# Altium PCB PCB1.PcbDoc
Units mil, origin at the board's own origin, x right, y up, seen from the top; angles counter-clockwise.
Board outline 1750 x 1250 mil, 4 copper layers (Top Layer, Layer 1, Layer 2, Bottom Layer), stack 60.119 mil thick; 34 components, 23 nets, 88 pads, 21 vias.
Unrouted connection lines stored in the file: 1.
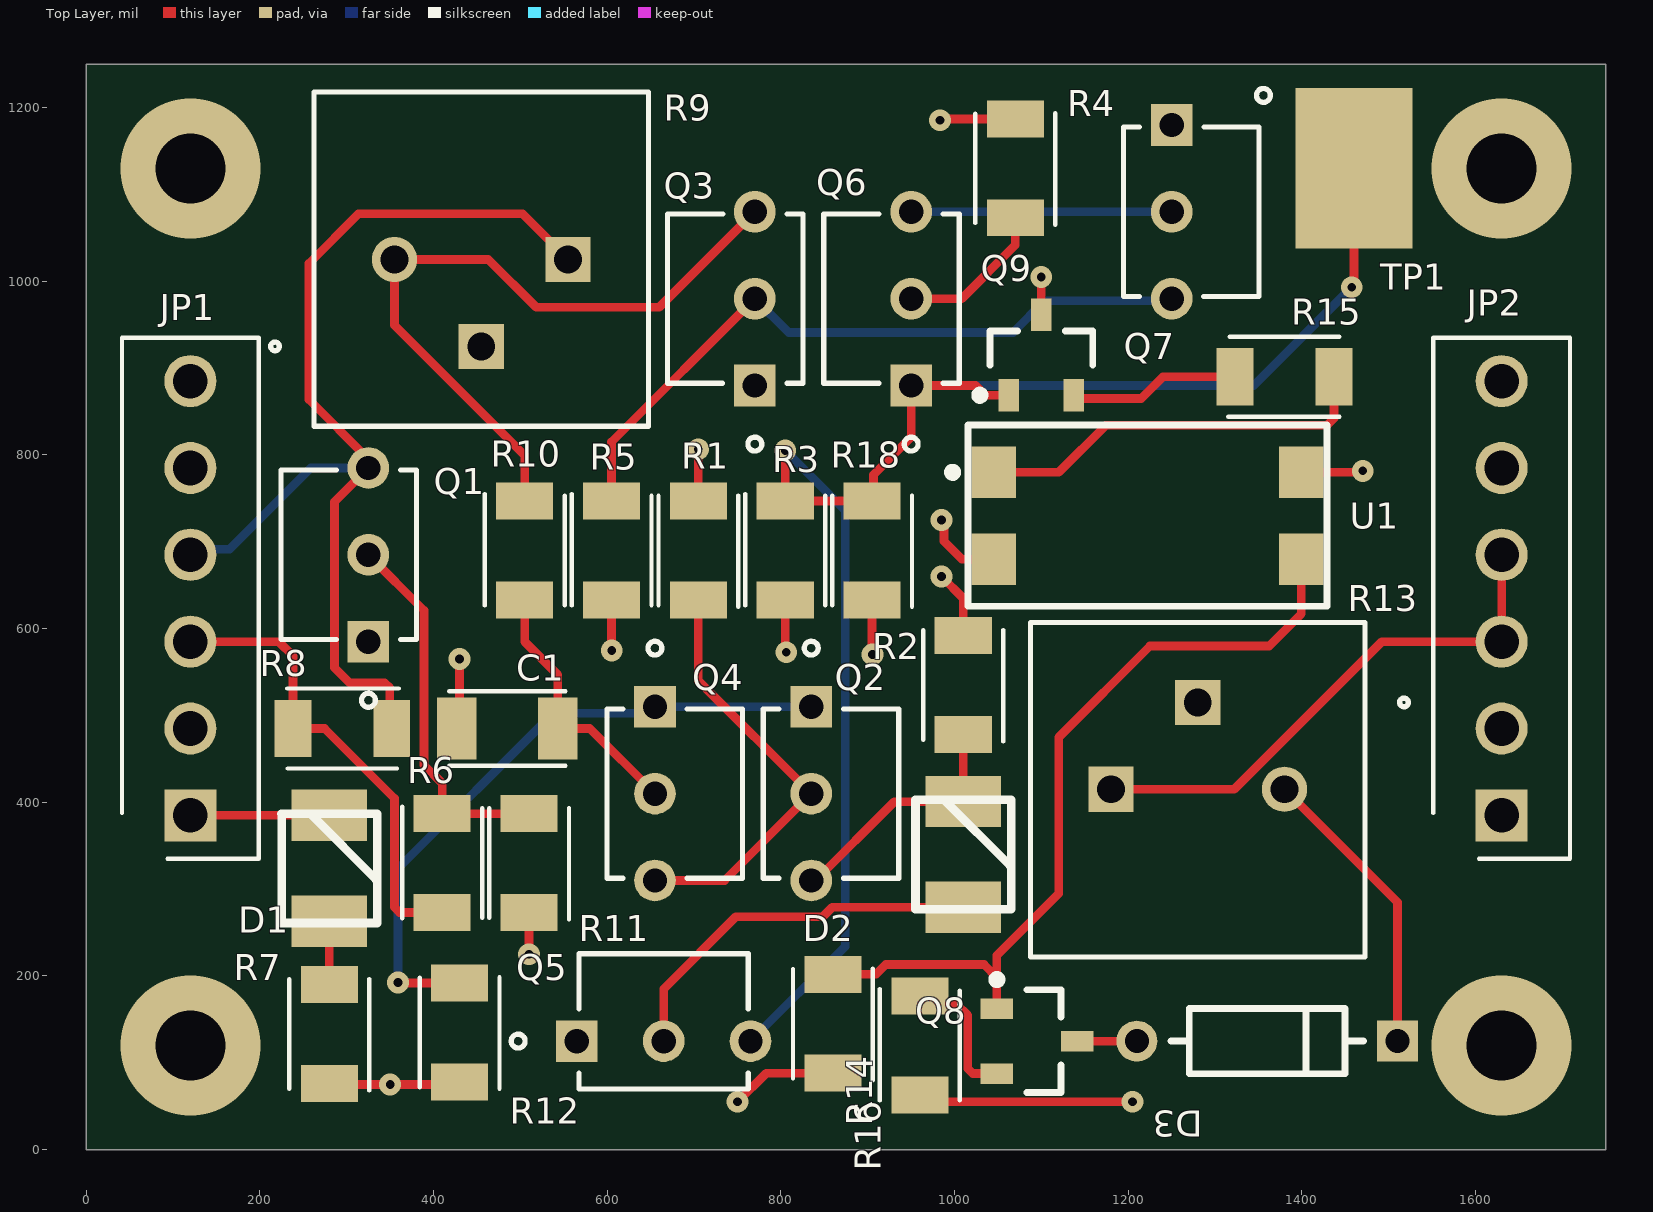
[diagram p0: Top Layer view]
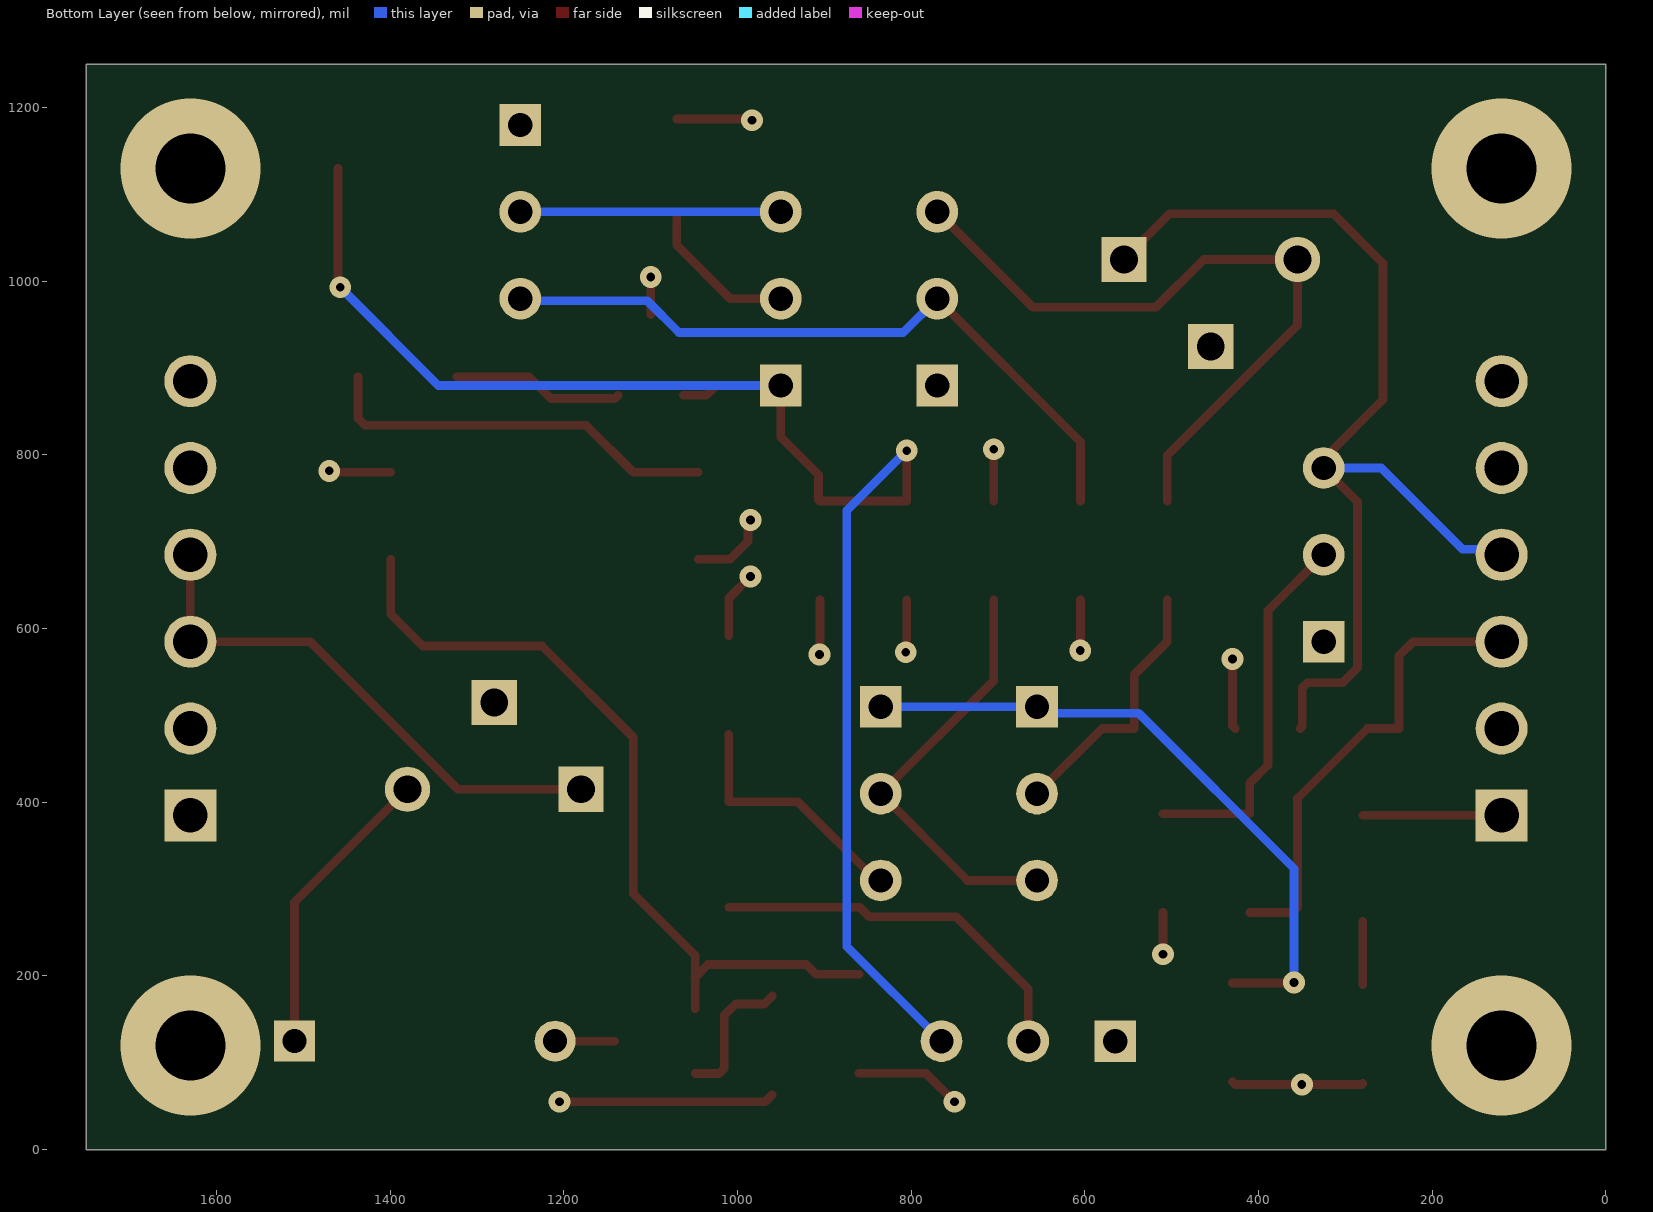
[diagram p1: Bottom Layer view, seen from below]
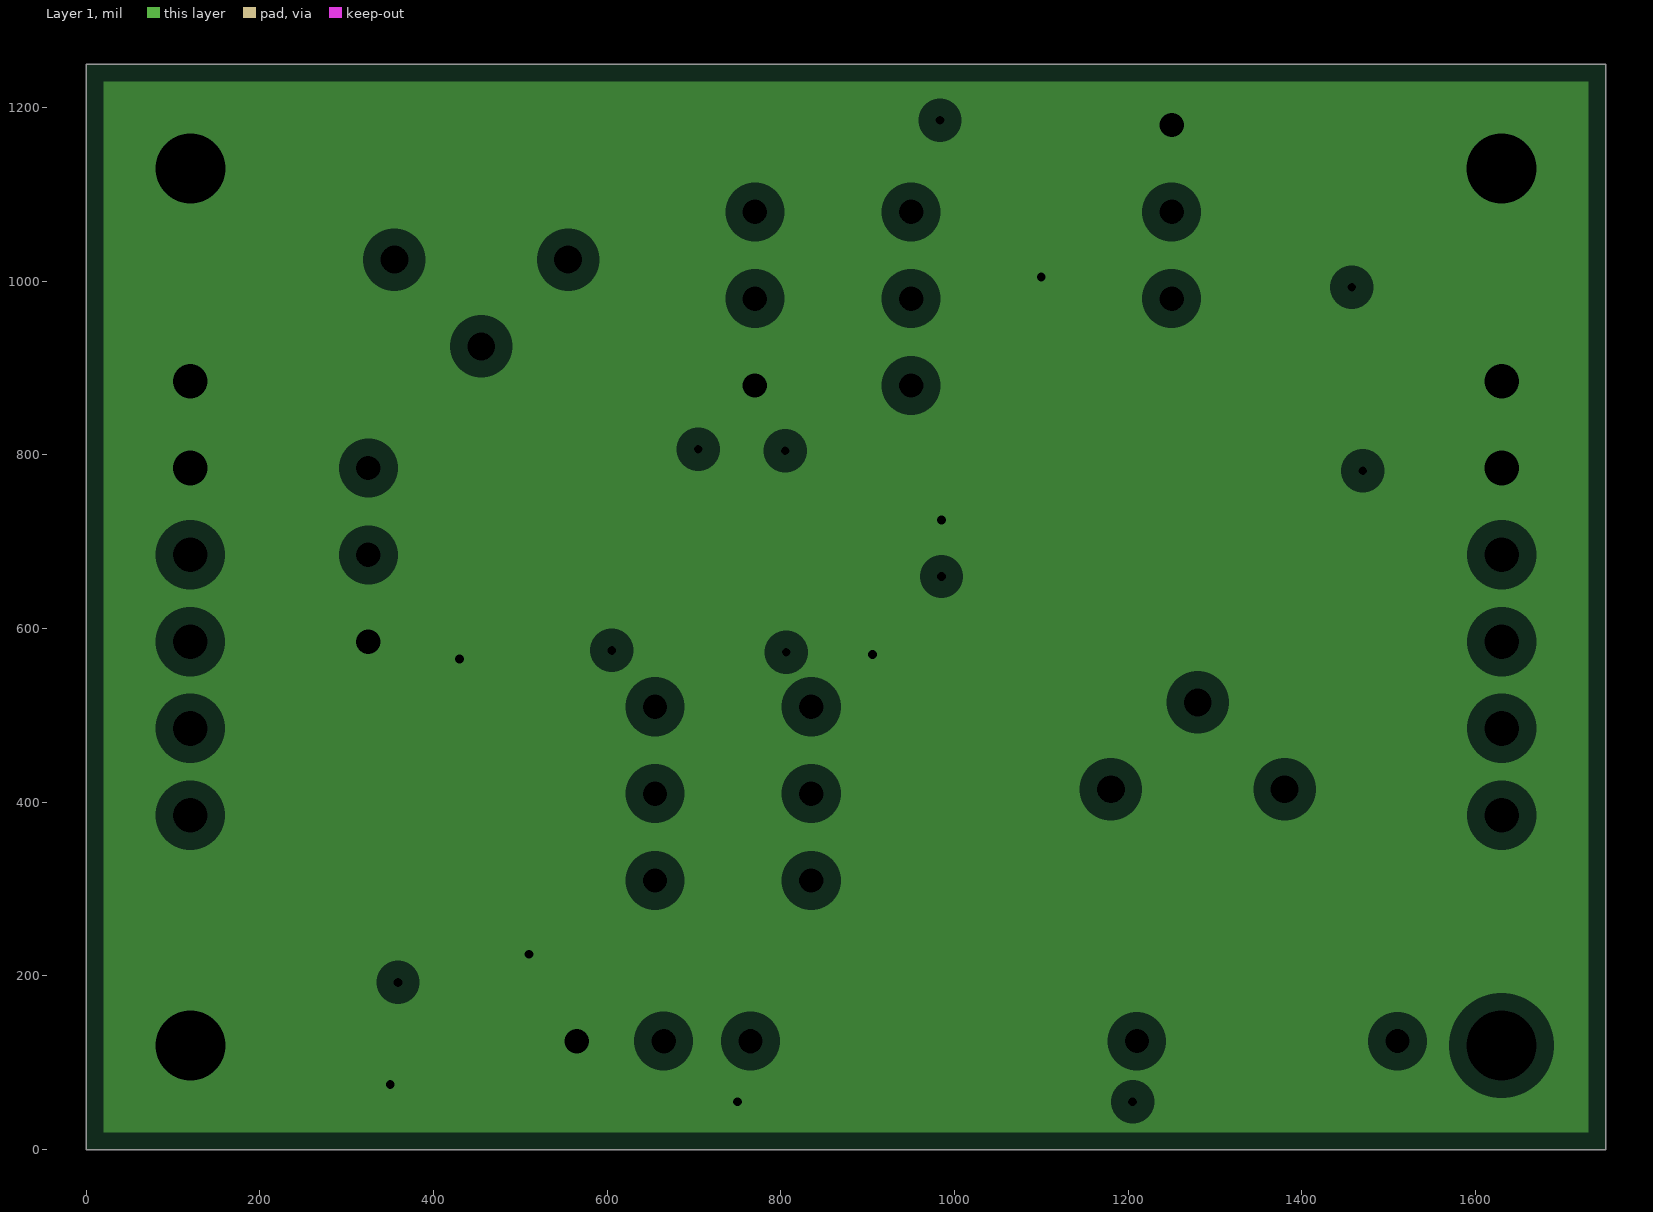
[diagram p2: Layer 1, clearances drawn from the general rule]
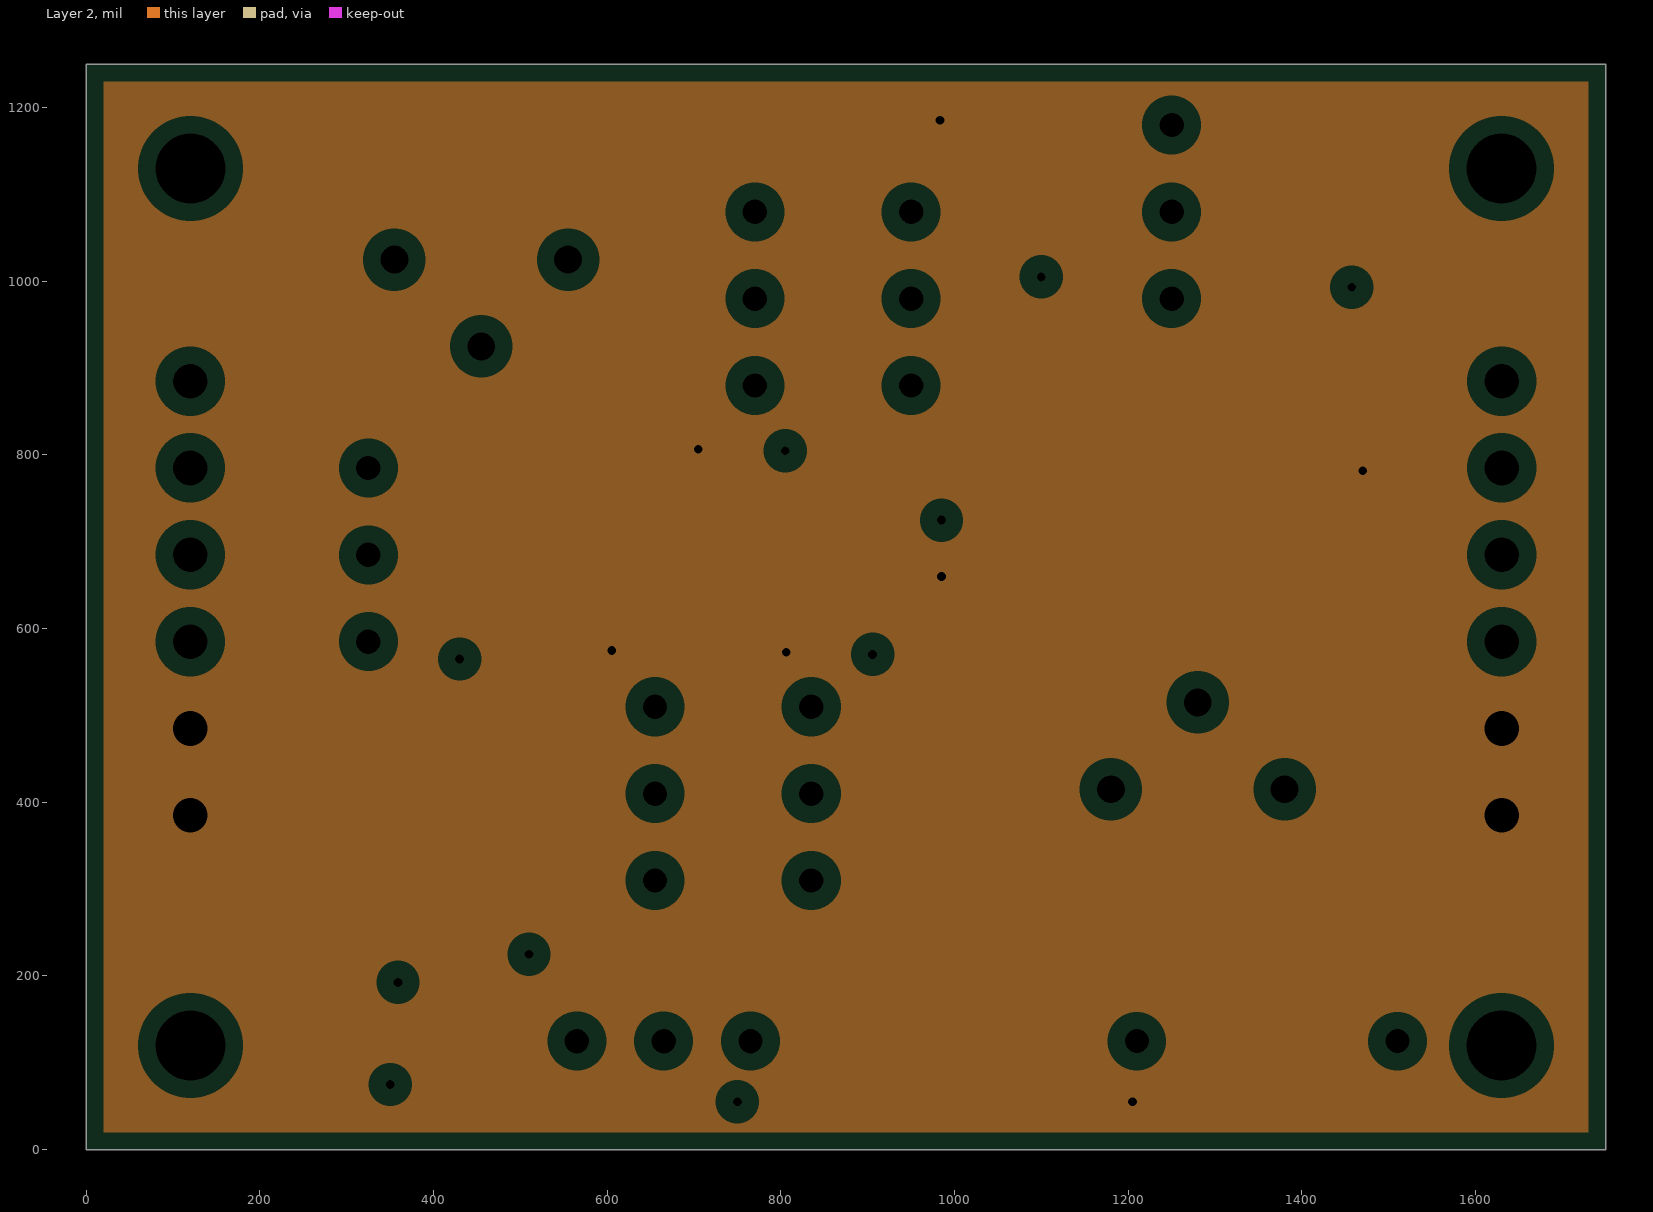
[diagram p3: Layer 2, clearances drawn from the general rule]
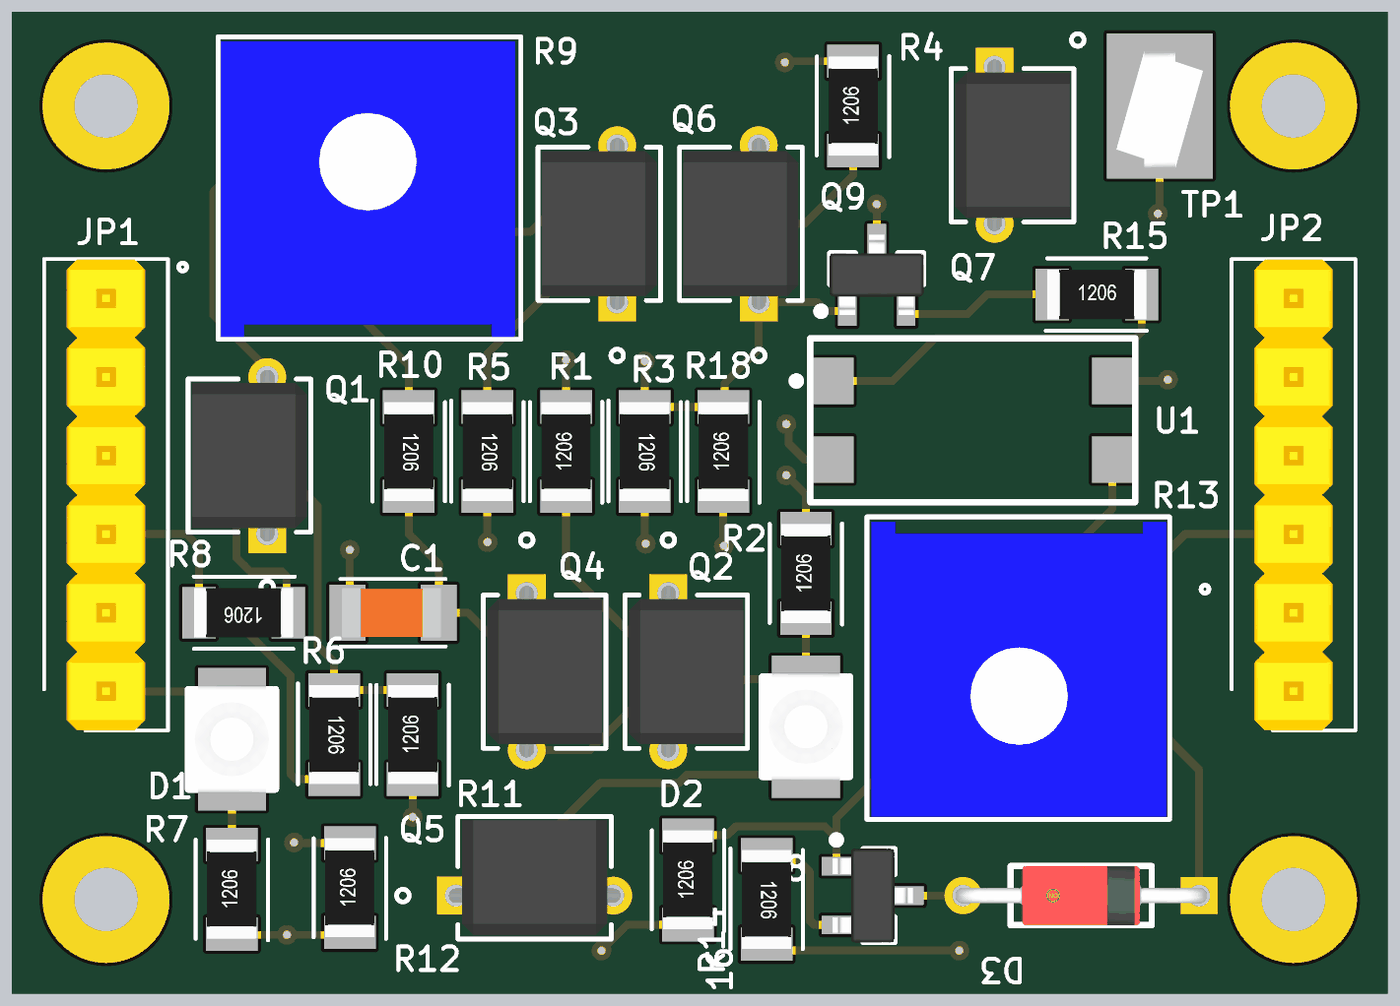
[diagram p4: 3D render of the assembled board from above, using the file's embedded part models]

## Layer stack, top to bottom
Top Solder: solder mask 0.4, Solder Resist, Dk 3.5
Top Layer: signal copper 0.689
Dielectric 2: prepreg 7.717, PP-006, Dk 4.74
Layer 1: plane copper 1.378, net GND
Dielectric 1: core 40.551, FR-4, Dk 4.6
Layer 2: plane copper 1.378, net +3V3
Dielectric 3: prepreg 7.717, PP-006, Dk 4.74
Bottom Layer: signal copper 0.689
Bottom Solder: solder mask 0.4, Solder Resist, Dk 3.5

## Board outline
0,0 0,1250 1750,1250 1750,0

## Design rules (kind name [scope] priority, off if disabled: settings)
Clearance [All] p1: gap=10 ignorepadtopadclearanceinfootprint=FALSE
PlaneClearance [All] p1: clearance=20
PlaneConnect [All] p1: planeconnectstyle=Relief reliefexpansion=20 reliefentries=4 reliefconductorwidth=10 reliefairgap=10
PolygonConnect [All] p1: connectstyle=Relief reliefconductorwidth=10 reliefentries=4 polygonreliefangle="90 Angle" airgapwidth=10
RoutingVias [All] p1: holewidth=10 width=25 viastyle="Through Hole" minholewidth=8 minwidth=18 maxholewidth=28 maxwidth=50
SolderMaskExpansion [All] p1: expansion=4 istentingtop=FALSE
SupplyNets "Schematic Supply Nets_1" [InNet('+3V3')] p1: voltage=0.000
SupplyNets "Schematic Supply Nets" [InNet('GND')] p2: voltage=0.000
Width [All] p1: maxlimit=10 minlimit=10 preferedwidth=10
28 further rules are at their usual default settings.

## Components (designator, comment, footprint, x,y, rotation, side; value= is the part's Value field where it differs from the comment)
C1 "C3216X5R1E476M160AC" C1206 485,485 r0 top
D1 "AA3528SESK/J3" 2-PLCC-RED 280,323.98 r270 top
D2 "AA3528SESK/J3" 2-PLCC-RED 1010,340 r270 top
D3 "1N4148WT" FP-017AG-MFG 1360,125 r180 top value=4pF
JP1 "HEADER_6X1" HEADER1x6PITCH100 120,385 r90 top
JP2 "HEADER_6X1" HEADER1x6PITCH100 1630,385 r90 top
Q1 "2n2222a" 2n2222a-Footprint-1 325,585 r90 top
Q2 "2n2222a" 2n2222a-Footprint-1 835,510 r270 top
Q3 "2n2222a" 2n2222a-Footprint-1 770,880 r90 top
Q4 "2n2222a" 2n2222a-Footprint-1 655,510 r270 top
Q5 "2n2222a" 2n2222a-Footprint-1 565,125 r0 top
Q6 "2n2222a" 2n2222a-Footprint-1 950,880 r90 top
Q7 "2n2222a" 2n2222a-Footprint-1 1250,1180 r270 top locked
Q8 "2N7002" 2N7002 1095,125 r0 top
Q9 "2N7002" 2N7002 1100,915 r90 top
R1 "RNCF1206TKY10K0" R1206 705,690 r90 top
R2 "ERJ-8ENF2001V" R1206 1010,535 r90 top
R3 "1k" R1206 805,690 r270 top
R4 "100k" R1206 1070,1130 r90 top
R5 "ERJ-8ENF2001V" R1206 605,690 r270 top
R6 "RNCF1206TKY10K0" R1206 410,330 r270 top
R7 "330" R1206 280,133.11 r90 top
R8 "ERJ-8ENF2000V" R1206 295,485 r180 top
R9 "Bourns 3386P-1-104LF" "Bourns 3386P-1-104LF-Footprint-1" 355,1025 r0 top
R10 "ERJ-8ENF2001V" R1206 505,690 r270 top
R11 "1k" R1206 510,330 r90 top
R12 "330" R1206 430,135 r90 top
R13 "3386P-1-504LF" 3386P-1-504LF-Footprint-1 1380,415 r180 top value=500kΩ
R14 "1k" R1206 960,120 r270 top
R15 "1k" R1206 1380,890 r0 top
R16 "RNCF1206TKY10K0" R1206 860,145 r90 top
R18 "ERJ-8ENF1004V" R1206 905,690 r90 top
TP1 "5016" 5016 1460,1130 r90 top
U1 "LTV-817S" LTST-LTV-817S-4_V 1222.17,730 r0 top

## Footprints (in the part's own frame and the unit in brackets; to place one, negate y for a bottom-side part, rotate by r counter-clockwise, add the part's x,y. Pads: shape width x height; smd on the part's side, far side on the other; paste and mask are expansions set on the pad)
2-PLCC-RED [mm] "Kingbright LED Footprint"
  rect 1.5x2.2 smd: 1(1.55,0) 2(-1.55,0)
  silkscreen extent -1.6,-1.4 1.6,1.4, body extent -1.75,-1.4 1.75,1.4, height 1.85
2n2222a-Footprint-1 [mil]
  rect 48x48 / inner round 60 / far side rect 48x48 hole 28 paste-99999 mask+0: 1(0,0)
  round 48 / inner round 60 / far side round 48 hole 28 paste-99999 mask+0: 2(100,0) 3(200,0)
  silkscreen extent -75,-55 198,101, body extent -9,-50 209,96, height 445
2N7002 [mm] "SOT23, 3-Leads, Body 2.92x2.35mm, Pitch 0.95mm, IPC Medium Density"
  rect 0.95x0.6 smd: 1(-1.175,0.95) 2(-1.175,-0.95) 3(1.175,0)
  silkscreen extent -1.3,-1.5 0.7,1.92, body extent -1.3,-1.52 1.3,1.52, height 1.11
3386P-1-504LF-Footprint-1 [mil]
  round 52 / inner round 60 / far side round 52 hole 32 paste-99999 mask+0: 1(0,0)
  rect 52x52 / inner round 60 / far side rect 52x52 hole 32 paste-99999 mask+0: 2(100,-100) 3(200,0)
  silkscreen extent -142,-192 292,193, body extent -89,-186 286,189, height 190
5016 [mil] "PC TEST POINT COMPACT SMT"
  rect 185x135 smd: 1(0,0)
  body extent -80,-55 70,55, height 91
"Bourns 3386P-1-104LF-Footprint-1" [mil]
  round 52 / inner round 60 / far side round 52 hole 32 paste-99999 mask+0: 1(0,0)
  rect 52x52 / inner round 60 / far side rect 52x52 hole 32 paste-99999 mask+0: 2(100,-100) 3(200,0)
  silkscreen extent -142,-192 292,193, body extent -90,-188 285,187, height 190
C1206 [mm] "3.20 mm L X 1.60 mm W X 1.40 mm H body"
  rect 1.16x1.82 smd: 1(-1.475,0) 2(1.475,0)
  silkscreen extent -1.7,-1.09 1.7,1.09, body extent -1.65,-0.8 1.55,0.8, height 1.15
FP-017AG-MFG [mm]
  rect 1.2x1.2 hole 0.7 paste-2539.97 mask+0: 1(-3.813,0)
  round 1.2 hole 0.7 paste-2539.97 mask+0: 2(3.813,0)
  silkscreen extent -2.81,-0.95 2.81,0.95, body extent -4.51,-1.05 4.51,1.05, height 0.25
HEADER1x6PITCH100 [mil] "Header1x6 .100\" Pitch Pin Header"
  rect 60x60 hole 40 paste-99999: 1(0,0)
  round 60 hole 40 paste-99999: 2(100,0)
  round 60 hole 40: 3(200,0) 4(300,0) 5(400,0) 6(500,0)
  silkscreen extent -50,-79 550,79, body extent -50,-50 550,50, height 384
LTST-LTV-817S-4_V [mm] "SMD, 4-Leads, Body 7x5.1mm, Pitch 2.54mm"
  rect 1.3x1.5 smd: 1(-4.5,1.27) 2(-4.5,-1.27) 3(4.5,-1.27) 4(4.5,1.27)
  silkscreen extent -5.82,-2.65 5.25,2.65, body extent -3.5,-2.55 3.5,2.55, height 4.4
R1206 [mm] "Resistor, Chip; 1206; 24 mil Height"
  rect 1.08x1.67 smd: 1(-1.445,0) 2(1.445,0)
  silkscreen extent -1.65,-1.17 1.61,1.17, body extent -1.6,-0.8 1.6,0.8, height 0.6

## Part data
C1: library part CMP-054-000061-1, "CER 47uF 25V X5R 1206 2.082mOhm", Design Item ID=C3216X5R1E476M160AC, Source=Capacitors.SchLib
D1 D2: library part CMP-043-000017-1, "LED Red 2.2V 20mA", Design Item ID=AA3528SESK/J3, Made By="Kyle Marino", Source=Diodes.SchLib
D3: library part CMP-00188-1, "Rectifier Diode, 1 Phase, 1 Element, 0.15A, 100V V(RRM), Silicon", Average Rectified Current=200mA, Case/Package=Axial, Current=3A, Forward Voltage=1V, Manufacturer Lifecycle Status=ACTIVE, Max Forward Surge Current (Ifsm)=2A, Max Junction Temperature (Tj)=175°C, Max Power Dissipation=500mW, Max Repetitive Reverse Voltage (Vrrm)=100V, Max Surge Current=4A, Min Operating Temperature=-55°C, Peak Reverse Current=5µA, Voltage=75V, China RoHS=Non-Compliant, Contact Plating=Tin, Country of Origin="Mainland China", Current Rating=200mA, Element Configuration=Single, Export Control Classification Number (ECCN) Code=EAR99, Forward Current=200mA, Harmonized Tariff Schedule (HTS) Code=8541.10.00.70, Height=1.91mm, Introduction Date=1999-01-01, Lead Free="Lead Free", Length=6.35mm, Lifecycle Status=Production, Max Operating Temperature=175°C, Max Output current=200mA, Max Reverse Voltage (DC)=100V, Mounting Technology="Through Hole", Number of Elements=1, Number of Terminals=2, Output Current=200mA, Outside Diameter=1.85mm, Peak Non-Repetitive Surge Current=4A, Pins=2, Polarity=Standard, Power Dissipation=500mW, Radiation Hardening=No, REACH SVHC=Yes, Recovery Time=4ns, Reverse Recovery Time=4ns, Reverse Standoff Voltage=100V, Reverse Voltage=100V, RoHS=Compliant, Schedule B="8541100070, 8541100070", Termination=Axial, Voltage Rating (DC)=100V, Weight=4.535924g, Width=6.35mm
JP1 JP2: library part CMP-021-000031-1, "HEADER VERT 6POS .100 TIN", Design Item ID=HEADER_6X1, Made By="Brennan Swanton", Reviewed By="Carter Allen", Source=Connectors.SchLib
Q1 Q2 Q3 Q4 Q5 Q6 Q7: library part CMP-00187-1, "Bipolar (BJT) Transistor NPN 40 V 600 mA 250MHz 625 mW Through Hole TO-92"
Q8 Q9: library part CMP-056-000001-1, "MOSFET N-CH 60V 115 mA", Design Item ID=2N7002, Made By="Kyle Marino", Source=Transistors.SchLib
R1 R6 R16: library part CMP-024-000097-3, "RES 10K OHM 0.01% 1/4W 1206", Design Item ID=RNCF1206TKY10K0, Made By="Jamie Smith", Source=Resistors.SchLib
R2 R5 R10: library part CMP-024-000048-3, "2K OHM 1% 1/4W 1206", Design Item ID=ERJ-8ENF2001V, Made By="Brennan Swanton", Reviewed By="Carter Allen", Source=Resistors.SchLib
R3 R11 R14 R15: library part CMP-024-000033-4, "1K OHM 1% 1/4W 1206", Supplier Part Number 1=P1.00KFCT-ND, Design Item ID=ERJ-8ENF1001V, Made By="Brennan Swanton", Reviewed By="Carter Allen", Source=Resistors.SchLib, Supplier 1=Digi-Key
R4: library part CMP-024-000035-4, "100K OHM 1% 1/4W 1206", Design Item ID=ERJ-8ENF1003V, Made By="Brennan Swanton", Reviewed By="Carter Allen", Source=Resistors.SchLib
R7 R12: library part CMP-024-000058-4, "330 OHM 1% 1/4W 1206", Supplier Part Number 1=P330FCT-ND, Design Item ID=ERJ-8ENF3300V, Made By="Brennan Swanton", Reviewed By="Carter Allen", Source=Resistors.SchLib, Supplier 1=Digi-Key
R8: library part CMP-024-000047-3, "200 OHM 1% 1/4W 1206", Design Item ID=ERJ-8ENF2000V, Made By="Jamie Smith", Source=Resistors.SchLib
R9: library part CMP-092-000045-1, "100 kOhms 0.5W, 1/2W PC Pins Through Hole Trimmer Potentiometer Cermet 1.0 Turn Top Adjustment"
R13: library part CMP-092-000044-1, "Cermet Not Linear VERTICAL Trimmer Potentiometer 卤10% 280deg 500mW 85C"
R18: library part CMP-024-000036-3, "1M OHM 1% 1/4W 1206", Design Item ID=ERJ-8ENF1004V, Made By="Jamie Smith", Source=Resistors.SchLib
TP1: library part CMP-053-000001-2, "PC TEST POINT COMPACT SMT", Design Item ID=5016, Reviewed By="Adam Rising", Source=Misc.SchLib
U1: library part CMP-00026-00000-2, "LTV Series Single Channel 35 V 5000 Vrms Transistor Output Optocoupler SMT-DIP-4", Made By="Diego Gomez Ruiz", Supplier 1=Digi-Key, Supplier Part Number 1=LTV-817S

## Via types
v1: diameter 25, hole 10, Top Layer to Bottom Layer, tented both sides, 17 vias
v2: diameter 161.42, hole 80.71, Top Layer to Bottom Layer, 4 vias

## Nets (pads, with @x,y where several pads share a name; then routed paths per layer and width w, separated by ;. In a path a pad name is that pad's centre, name@x,y a point inside that pad or via, vN(x,y) a via of type N, cw(c..) or ccw(c..) an arc to the next point about the centre after c; other vN are vias at no path point)
+3V3: D1.2 JP1.1 JP1.2 JP2.1 JP2.2 R1.2 R2.2 R3.2 R4.2 R5.2 R14.2 U1.4 | length 824.2
  Top Layer w10: JP1.1 D1.2 ; R5.2 605,575.05 v1(605.19,574.86) ; v1(704.95,806.42) v1(704.95,806.42) R1.2 ; R3.2 805,574.08 v1(806.17,572.91) ; R14.2 968.11,55 v1(1205,55) ; v1(983.24,1185.53) 984.6,1186.89 R4.2 ; v1(985,660) 1010,635 R2.2 ; U1.4 1468.58,780 v1(1470.19,781.61)
FB: Q3.3 R9.1 R10.1 | length 823.6
  Top Layer w10: R10.1 505,799.46 355,949.46 R9.1 463.18,1025 518.18,970 660,970 Q3.3
G12_E: Q2.1 Q4.1 R12.2 | length 755.4
  Top Layer w10: v1(359.08,192.56) 359.75,191.89 R12.2
  Bottom Layer w10: v1(359.08,192.56) 359.08,323.65 537.93,502.5 647.5,502.5 Q4.1 Q2.1
G23_GA: D2.2 Q2.3 R2.1 | length 289.8
  Top Layer w10: Q2.3 839.94,310 930.67,400.73 1009.71,400.73 D2.2 R2.1
G23_GK: D2.1 Q5.2 | length 443.9
  Top Layer w10: Q5.2 665,185 748.12,268.12 848.28,268.12 859.13,278.98 D2.1
GND: C1.1 JP1.5 JP1.6 JP2.5 JP2.6 Q1.1 Q3.1 Q5.1 Q7.1 Q9.3 R7.1 R11.1 R12.1 R16.1 R18.1 U1.2 | length 603
  Top Layer w10: R7.1 281.22,75 v1(350,75) 426.89,75 R12.1 ; C1.1 430,488.07 v1(430,565) ; v1(510,225) R11.1 ; v1(750,55) 783.11,88.11 R16.1 ; R18.1 905,570.86 v1(905.61,570.25) ; v1(985,725) 987.87,722.13 987.87,700.66 1008.53,680 U1.2 ; Q9.3 v1(1100,1005)
  other v2: 120,120 120,1130 1630,1130
NetD1_1: D1.1 R7.2 | length 73
  Top Layer w10: R7.2 D1.1
NetJP1_3: JP1.3 R6.2 R8.2 | length 541.7
  Top Layer w10: JP1.3 221.83,585 238.11,568.72 R8.2 274.37,485 355,404.37 355,278.97 360.86,273.11 R6.2
NetJP1_4: JP1.4 Q1.3 R8.1 R9.3 | length 1221.3
  Top Layer w10: R8.1 349.44,487.45 349.44,531.75 343.58,537.6 303.18,537.6 286,554.79 286,746 Q1.3 325,795.28 256.53,863.75 256.53,1020.52 313.61,1077.6 502.4,1077.6 R9.3
  Bottom Layer w10: JP1.4 126.34,691.34 165,691.34 258.66,785 Q1.3
NetJP2_3: JP2.3 JP2.4 R13.3 | length 620.4
  Top Layer w10: R13.3 1322.02,415 1492.02,585 JP2.3 JP2.4
NetQ1_2: Q1.2 R6.1 R11.2 | length 433.3
  Top Layer w10: Q1.2 389.09,620.91 389.09,442.96 410,422.05 R6.1 R11.2
NetQ6_2: Q6.2 R4.1 | length 176.9
  Top Layer w10: Q6.2 1008.19,980 1070,1041.81 R4.1
Q1_G: C1.2 Q4.2 R10.2 | length 306.9
  Top Layer w10: R10.2 505,585 543.07,546.93 C1.2 580,485 Q4.2
Q7_S: Q9.2 R15.1 | length 197.6
  Top Layer w10: Q9.2 1141.14,865 1215,865 1240,890 R15.1
Q8_D: D3.2 Q8.3 | length 68.6
  Top Layer w10: Q8.3 D3.2
  other v2: 1630,120
Q8_DK: D3.1 R13.1 | length 343.9
  Top Layer w10: R13.1 1510.12,284.88 D3.1
Q8_S: Q8.2 R14.1 | length 161.6
  Top Layer w10: R14.1 969.14,167.75 1002.02,167.75 1015.04,154.72 1015.04,93.46 1020.9,87.6 Q8.2
Q12_G: Q2.2 Q4.3 R1.1 | length 498.4
  Top Layer w10: Q4.3 735,310 Q2.2 705,540 R1.1
Q34_G: Q5.3 Q6.1 Q9.1 R3.1 R18.2 TP1.1 | length 1873.2
  Top Layer w10: v1(805,805) R3.1 R18.2 906.65,748.54 906.65,777.29 950,820.64 Q6.1 1024.35,880 1035.61,868.74 Q9.1 ; v1(1457.39,992.96) 1460,995.57 TP1.1
  Bottom Layer w10: Q5.3 874,234 874,736 v1(805,805) ; Q6.1 1344.43,880 v1(1457.39,992.96)
Q45_CG: Q6.3 Q7.2 | length 300
  Bottom Layer w10: Q6.3 Q7.2
Q56_G: Q3.2 Q7.3 R5.1 | length 813.8
  Top Layer w10: R5.1 605,815 Q3.2
  Bottom Layer w10: Q3.2 809,941 1067.28,941 1103.78,977.5 1247.5,977.5 Q7.3
U_IN: R15.2 U1.1 | length 465.4
  Top Layer w10: U1.1 1120,780 1174.33,834.33 1428.86,834.33 1436.89,842.36 R15.2
U_Q8_G: Q8.1 R16.2 U1.3 | length 943.3
  Top Layer w10: R16.2 909.65,201.89 920.91,213.15 1034,213.15 1049.11,198.04 ; Q8.1 1048.74,223.67 1120,294.93 1120,475 1225,580 1362.39,580 1399.33,616.94 U1.3
pads on no net: R9.2 R13.2

## Polygon pours and split planes (outlines as drawn)
GND on Layer 1 (split plane): 1729.9,20.1 20.1,20.1 20.1,1229.9 1729.9,1229.9
+3V3 on Layer 2 (split plane): 1729.9,20.1 20.1,20.1 20.1,1229.9 1729.9,1229.9

## Silkscreen, mask and mechanical layers (free items; w line width, h text height)
Mechanical 1:
  the board outline again, w10

## Dimensions
0,0 to 1750,0 on Mechanical 13
1750,0 to 1750,1250 on Mechanical 13
1630,120 to 1630,1130 on Mechanical 13
120,120 to 1630,120 on Mechanical 13

## Text inside footprints (layer, text, board x,y; h text height)
Q1: Mechanical 13 "RefDes2" at 327.33,597.5 h50 r90
Q2: Mechanical 13 "RefDes2" at 832.67,497.5 h50 r270
Q3: Mechanical 13 "RefDes2" at 772.33,892.5 h50 r90
Q4: Mechanical 13 "RefDes2" at 652.67,497.5 h50 r270
Q5: Mechanical 13 "RefDes2" at 577.5,122.67 h50
Q6: Mechanical 13 "RefDes2" at 923.27,872.6 h50 r90
Q7: Mechanical 13 "RefDes2" at 1150,1160 h50 r270
R9: Mechanical 13 "RefDes2" at 367.5,1000.5 h50
R13: Mechanical 13 "RefDes2" at 1367.5,439.5 h50 r180